# Altium PCB Rackmount_DSP.PcbDoc (part 5 of 24)
Units mil, origin at the board's own origin, x right, y up, seen from the top; angles counter-clockwise.
Board outline 10629.92 x 8267.72 mil, 4 copper layers (Top Layer, Mid Layer 1, Mid Layer 2, Bottom Layer), stack 36.2 mil thick; 4500 components, 1565 nets, 9765 pads, 3289 vias.
Unrouted connection lines stored in the file: 1.
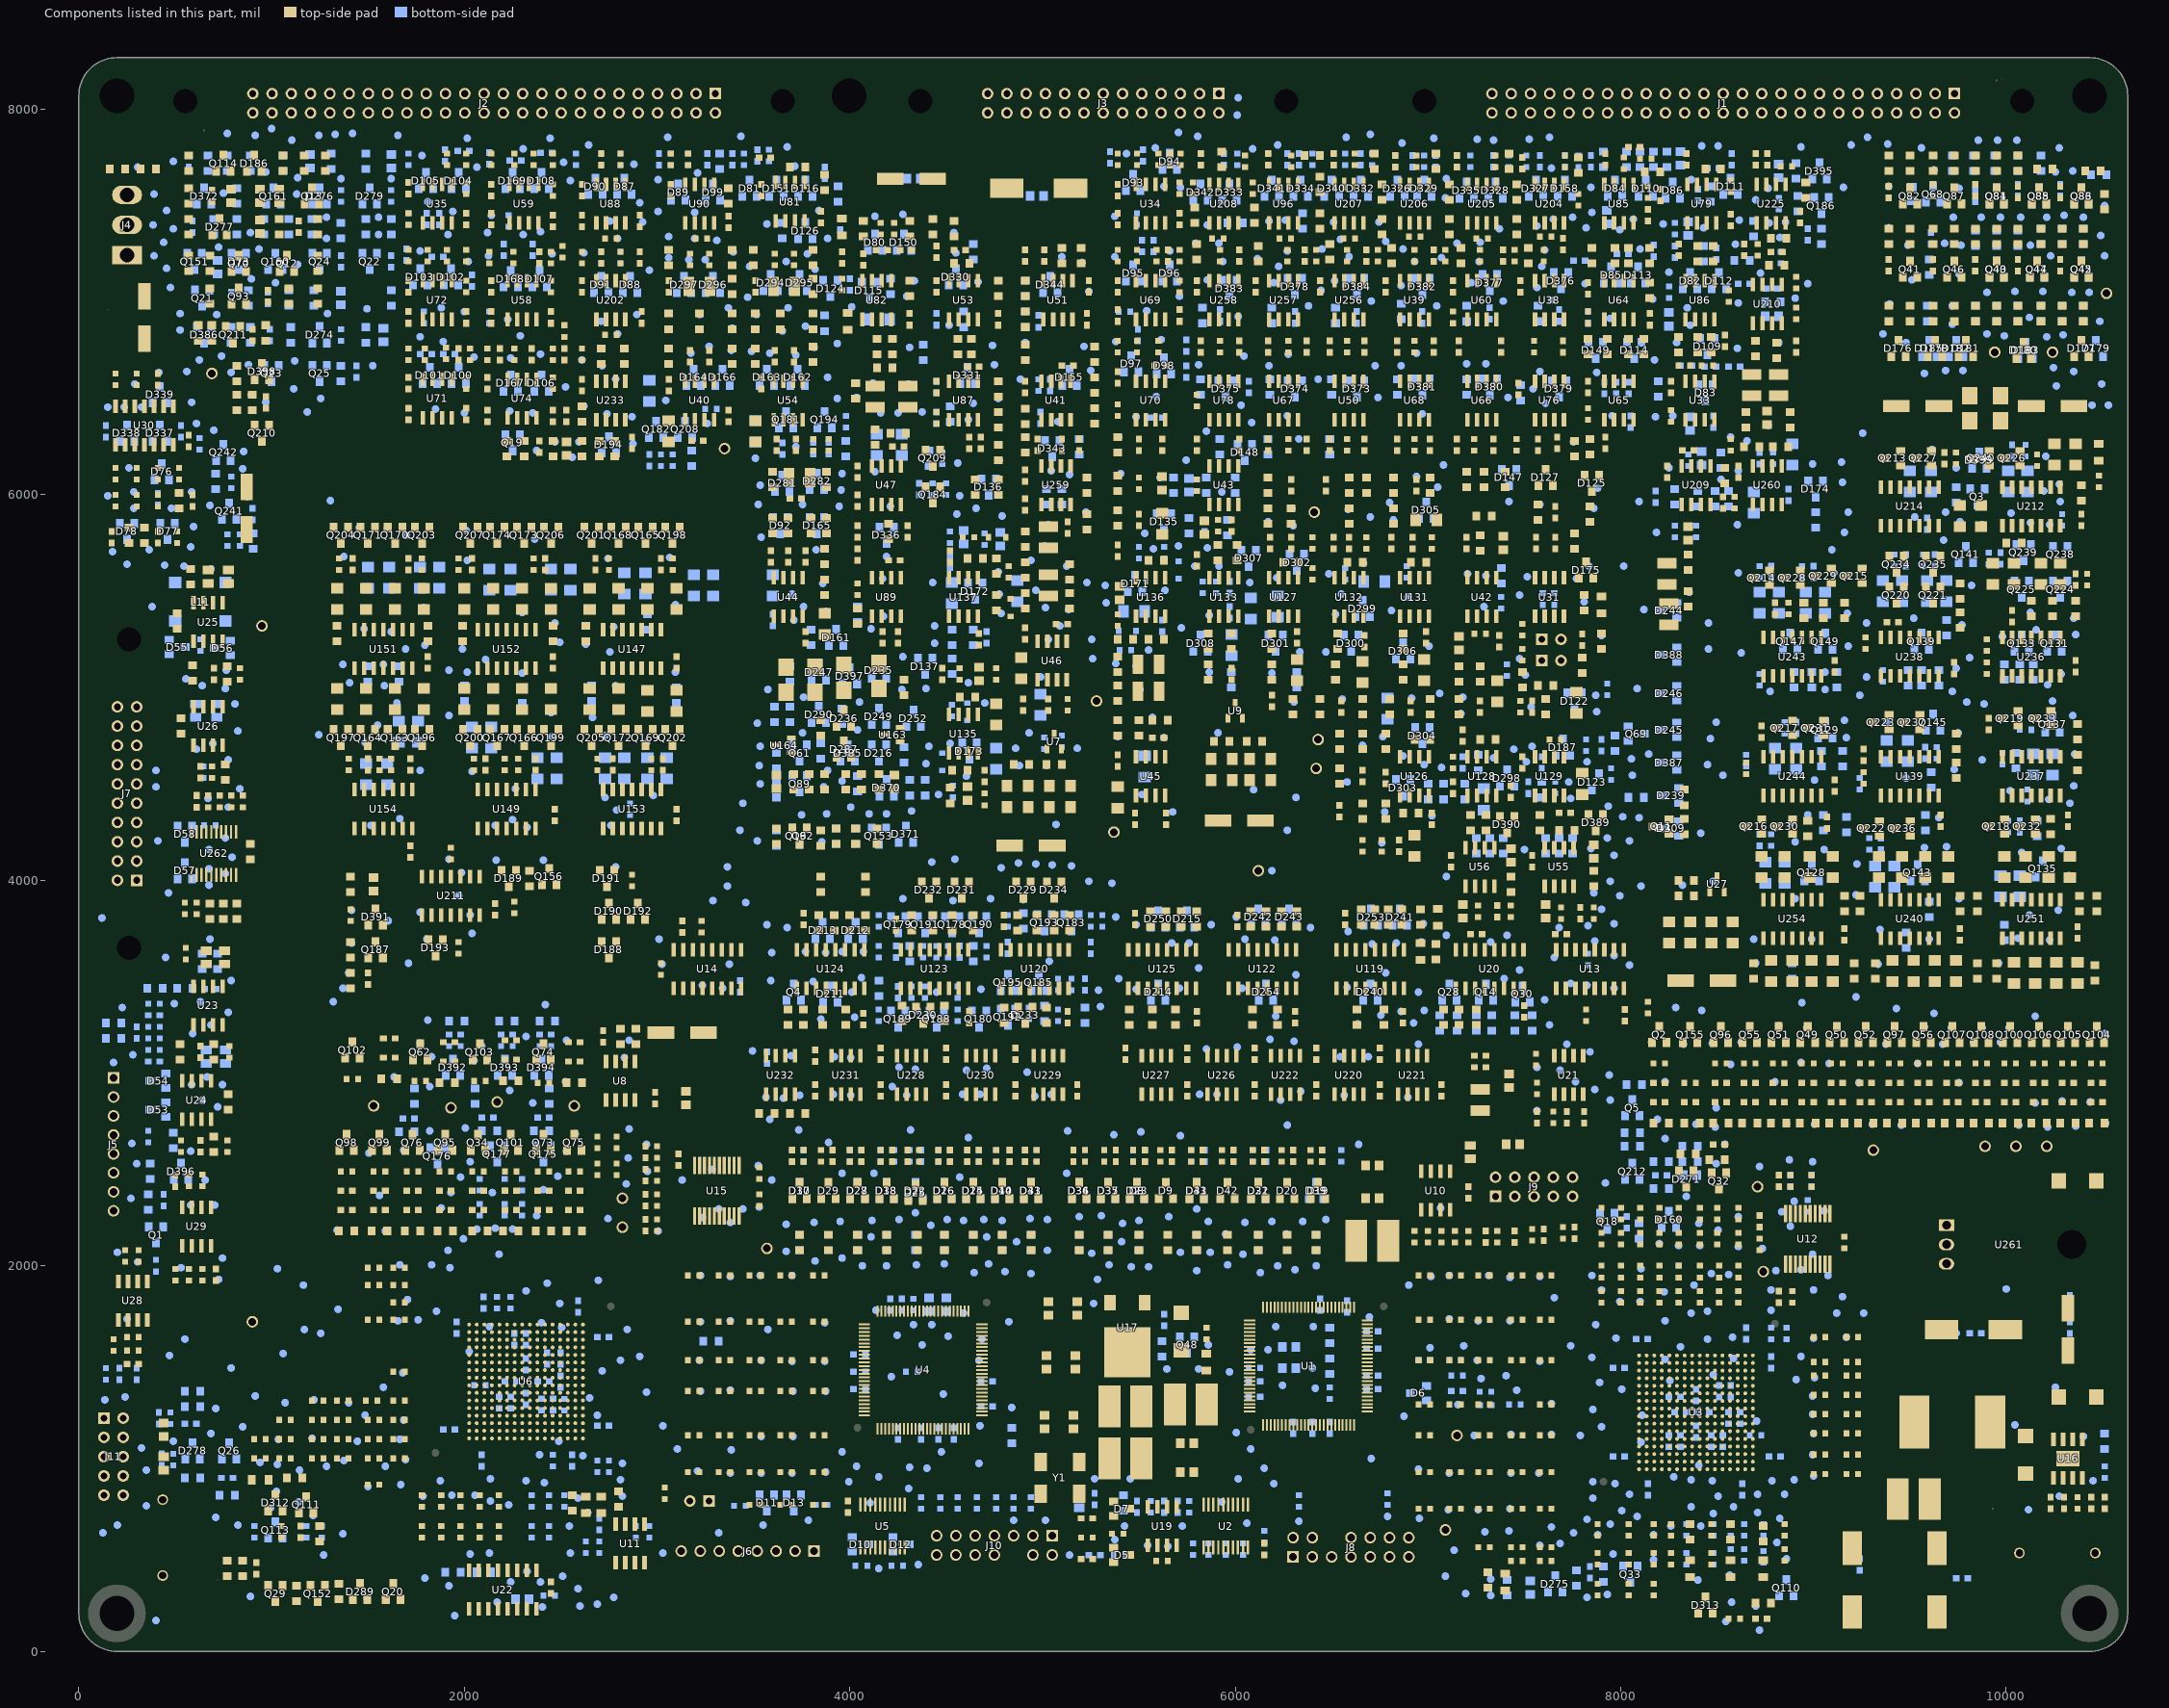
[diagram p7: the components of this part, seen from the top]

## Components (designator, comment, footprint, x,y, rotation, side; value= is the part's Value field where it differs from the comment) (continued)
TP1519 "Comment" ict-smd40 9755,3905 r0 bottom
TP1520 "Comment" ict-smd40 9480,4530 r0 bottom
TP1524 "Comment" ict-smd40 9695,4010 r0 bottom
TP1525 "Comment" ict-smd40 9690,4175 r0 bottom
TP1526 "Comment" ict-smd40 9740,5100 r0 bottom
TP1531 "Comment" ict-smd40 9650,4325 r0 bottom
TP1532 "Comment" ict-smd40 9335,3565 r0 bottom
TP1534 "Comment" ict-smd40 9750,4765 r0 bottom
TP1535 "Comment" ict-smd40 9730,4575 r0 bottom
TP1537 "Comment" ict-smd40 9220,3925 r0 bottom
TP1538 "Comment" ict-smd40 8775,4980 r0 bottom
TP1539 "Comment" ict-smd40 8700,3570 r0 bottom
TP1540 "Comment" ict-smd40 8905,3905 r0 bottom
TP1541 "Comment" ict-smd40 8990,3695 r0 bottom
TP1542 "Comment" ict-smd40 8690,3695 r0 bottom
TP1546 "Comment" ict-smd40 9060,4990 r0 bottom
TP1547 "Comment" ict-smd40 9175,5385 r0 bottom
TP1554 "Comment" ict-smd40 9170,4740 r0 bottom
TP1555 "Comment" ict-smd40 9160,4830 r0 bottom
TP1557 "Comment" ict-smd40 9005,4520 r0 bottom
TP1562 "Comment" ict-smd40 6690,3085 r0 bottom
TP1563 "Comment" ict-smd40 5370,2680 r0 bottom
TP1564 "Comment" ict-smd40 7935,4385 r0 bottom
TP1565 "Comment" ict-smd40 2410,4105 r0 bottom
TP1567 "Comment" ict-smd40 2110,5145 r0 bottom
TP1568 "Comment" ict-smd40 2755,5185 r0 bottom
TP1570 "Comment" ict-smd40 1990,5200 r0 bottom
TP1571 "Comment" ict-smd40 2325,4275 r0 bottom
TP1572 "Comment" ict-smd40 1795,5220 r0 bottom
TP1574 "Comment" ict-smd40 2145,4880 r0 bottom
TP1575 "Comment" ict-smd40 1620,5290 r0 bottom
TP1576 "Comment" ict-smd40 1550,4805 r0 bottom
TP1577 "Comment" ict-smd40 8230,2955 r0 bottom
TP1578 "Comment" ict-smd40 5290,3430 r0 bottom
TP1579 "Comment" ict-smd40 4730,3905 r0 bottom
TP1580 "Comment" ict-smd40 5240,3995 r0 bottom
TP1581 "Comment" ict-smd40 1920,4855 r0 bottom
TP1582 "Comment" ict-smd40 1710,3570 r0 bottom
TP1583 "Comment" ict-smd40 1405,5025 r0 bottom
TP1584 "Comment" ict-smd40 1370,5120 r0 bottom
TP1585 "Comment" ict-smd40 1585,5010 r0 bottom
TP1586 "Comment" ict-smd40 2665,4845 r0 bottom
TP1587 "Comment" ict-smd40 2630,5225 r0 bottom
TP1588 "Comment" ict-smd40 1920,5090 r0 bottom
TP1589 "Comment" ict-smd40 2030,3820 r0 bottom
TP1590 "Comment" ict-smd40 7865,2915 r0 bottom
TP1593 "Comment" ict-smd40 4605,4540 r0 bottom
TP1594 "Comment" ict-smd40 6550,5485 r0 bottom
TP1595 "Comment" ict-smd40 7340,4635 r0 bottom
TP1596 "Comment" ict-smd40 5790,5630 r0 bottom
TP1597 "Comment" ict-smd40 2470,5335 r0 bottom
TP1598 "Comment" ict-smd40 2010,5815 r0 bottom
TP1599 "Comment" ict-smd40 2450,4870 r0 bottom
TP1600 "Comment" ict-smd40 1600,5825 r0 bottom
TP1603 "Comment" ict-smd40 1455,5830 r0 bottom
TP1604 "Comment" ict-smd40 1245,4755 r0 bottom
TP1605 "Comment" ict-smd40 8045,4205 r0 bottom
TP1606 "Comment" ict-smd40 7510,4615 r0 bottom
TP1607 "Comment" ict-smd40 4965,4085 r0 bottom
TP1608 "Comment" ict-smd40 6640,2630 r0 bottom
TP1609 "Comment" ict-smd40 7965,3610 r0 bottom
TP1610 "Comment" ict-smd40 10115,735 r0 bottom
TP1611 "Comment" ict-smd40 10450,885 r0 bottom
TP1612 "Comment" ict-smd40 2000,6950 r0 bottom
TP1613 "Comment" ict-smd40 8065,7430 r0 bottom
TP1614 "Comment" ict-smd40 7920,2430 r0 bottom
TP1615 "Comment" ict-smd40 1370,3440 r0 bottom
TP1616 "Comment" ict-smd40 1320,3370 r0 bottom
TP1617 "Comment" ict-smd40 7630,7855 r0 bottom
TP1618 "Comment" ict-smd40 7070,7230 r0 bottom
TP1619 "Comment" ict-smd40 7070,4585 r0 bottom
TP1620 "Comment" ict-smd40 7020,4335 r0 bottom
TP1621 "Comment" ict-smd40 7445,4680 r0 bottom
TP1622 "Comment" ict-smd40 2015,5080 r0 bottom
TP1623 "Comment" ict-smd40 2775,5315 r0 bottom
TP1624 "Comment" ict-smd40 2160,4285 r0 bottom
TP1625 "Comment" ict-smd40 2165,4105 r0 bottom
TP1626 "Comment" ict-smd40 2250,4315 r0 bottom
TP1627 "Comment" ict-smd40 1985,4040 r0 bottom
TP1628 "Comment" ict-smd40 3445,4400 r0 bottom
TP1629 "Comment" ict-smd40 1790,5415 r0 bottom
TP1630 "Comment" ict-smd40 3095,5080 r0 bottom
TP1631 "Comment" ict-smd40 2760,4285 r0 bottom
TP1632 "Comment" ict-smd40 2040,3725 r0 bottom
TP1633 "Comment" ict-smd40 2785,4070 r0 bottom
TP1634 "Comment" ict-smd40 1970,3920 r0 bottom
TP1635 "Comment" ict-smd40 1580,5120 r0 bottom
TP1636 "Comment" ict-smd40 2000,5405 r0 bottom
TP1637 "Comment" ict-smd40 1515,4285 r0 bottom
TP1638 "Comment" ict-smd40 1770,3835 r0 bottom
TP1639 "Comment" ict-smd40 1605,3790 r0 bottom
TP1640 "Comment" ict-smd40 1805,3695 r0 bottom
TP1641 "Comment" ict-smd40 1920,4110 r0 bottom
TP1643 "Comment" ict-smd40 7740,4425 r0 bottom
TP1644 "Comment" ict-smd40 1695,5200 r0 bottom
TP1645 "Comment" ict-smd40 1480,5305 r0 bottom
TP1646 "Comment" ict-smd40 3010,3695 r0 bottom
TP1647 "Comment" ict-smd40 2300,5075 r0 bottom
TP1648 "Comment" ict-smd40 2300,5390 r0 bottom
TP1649 "Comment" ict-smd40 2785,5010 r0 bottom
TP1650 "Comment" ict-smd40 3095,5430 r0 bottom
TP1651 "Comment" ict-smd40 3960,3630 r0 bottom
TP1652 "Comment" ict-smd40 4070,3630 r0 bottom
TP1653 "Comment" ict-smd40 3770,3630 r0 bottom
TP1654 "Comment" ict-smd40 3875,3625 r0 bottom
TP1655 "Comment" ict-smd40 8495,2530 r0 bottom
TP1657 "Comment" ict-smd40 8170,605 r0 bottom
TP1658 "Comment" ict-smd40 8005,730 r0 bottom
TP1659 "Comment" ict-smd40 8085,700 r0 bottom
TP1660 "Comment" ict-smd40 7945,660 r0 bottom
TP1661 "Comment" ict-smd40 3495,3115 r0 bottom
TP1662 "Comment" ict-smd40 5050,4080 r0 bottom
TP1663 "Comment" ict-smd40 5150,4075 r0 bottom
TP1664 "Comment" ict-smd40 4785,4065 r0 bottom
TP1666 "Comment" ict-smd40 4450,3420 r0 bottom
TP1667 "Comment" ict-smd40 10195,6020 r0 bottom
TP1668 "Comment" ict-smd40 325,6455 r0 bottom
TP1669 "Comment" ict-smd40 2640,720 r0 bottom
TP1670 "Comment" ict-smd40 2820,805 r0 bottom
TP1671 "Comment" ict-smd40 710,1260 r0 bottom
TP1672 "Comment" ict-smd40 350,755 r0 bottom
TP1673 "Comment" ict-smd40 9960,6390 r0 bottom
TP1674 "Comment" ict-smd40 10255,1370 r0 bottom
TP1675 "Comment" ict-smd40 385,7400 r0 bottom
TP1676 "Comment" ict-smd40 390,7240 r0 bottom
TP1677 "Comment" ict-smd40 390,7560 r0 bottom
TP1678 "Comment" ict-smd40 9275,5335 r0 bottom
TP1679 "Comment" ict-smd40 6315,4430 r0 bottom
TP1680 "Comment" ict-smd40 7680,3755 r0 bottom
TP1681 "Comment" ict-smd40 7325,3680 r0 bottom
TP1682 "Comment" ict-smd40 8565,395 r0 bottom
TP1683 "Comment" ict-smd40 8415,650 r0 bottom
TP1684 "Comment" ict-smd40 655,2445 r0 bottom
TP1685 "Comment" ict-smd40 7505,5065 r0 bottom
TP1686 "Comment" ict-smd40 7690,5140 r0 bottom
TP1687 "Comment" ict-smd40 5300,3345 r0 bottom
TP1688 "Comment" ict-smd40 5035,3580 r0 bottom
TP1689 "Comment" ict-smd40 4900,3900 r0 bottom
TP1690 "Comment" ict-smd40 5380,3810 r0 bottom
TP1691 "Comment" ict-smd40 4560,6165 r0 bottom
TP1692 "Comment" ict-smd40 4570,5995 r0 bottom
TP1693 "Comment" ict-smd40 7845,4165 r0 bottom
TP1695 "Comment" ict-smd40 7965,3775 r0 bottom
TP1696 "Comment" ict-smd40 7930,4220 r0 bottom
TP1697 "Comment" ict-smd40 7860,3935 r0 bottom
TP1698 "Comment" ict-smd40 7410,3715 r0 bottom
TP1699 "Comment" ict-smd40 7500,4160 r0 bottom
TP1703 "Comment" ict-smd40 3065,5675 r0 bottom
TP1706 "Comment" ict-smd40 2745,5670 r0 bottom
TP1707 "Comment" ict-smd40 2265,4475 r0 bottom
TP1710 "Comment" ict-smd40 2945,4715 r0 bottom
TP1711 "Comment" ict-smd40 1700,5790 r0 bottom
TP1712 "Comment" ict-smd40 1375,5680 r0 bottom
TP1714 "Comment" ict-smd40 8855,7415 r0 bottom
TP1715 "Comment" ict-smd40 9155,7595 r0 bottom
TP1716 "Comment" ict-smd40 8765,7590 r0 bottom
TP1721 "Comment" ict-smd40 7515,5575 r0 bottom
TP1722 "Comment" ict-smd40 5610,6090 r0 bottom
TP1723 "Comment" ict-smd40 2365,5770 r0 bottom
TP1724 "Comment" ict-smd40 2015,5660 r0 bottom
TP1726 "Comment" ict-smd40 5125,5630 r0 bottom
TP1727 "Comment" ict-smd40 4060,3495 r0 bottom
TP1728 "Comment" ict-smd40 4350,3325 r0 bottom
TP1729 "Comment" ict-smd40 4275,3905 r0 bottom
TP1730 "Comment" ict-smd40 4245,1640 r0 bottom
TP1731 "Comment" ict-smd40 4135,1770 r0 bottom
TP1732 "Comment" ict-smd40 3595,2445 r0 bottom
TP1733 "Comment" ict-smd40 9740,1650 r0 bottom
TP1734 "Comment" ict-smd40 8245,3675 r0 bottom
TP1735 "Comment" ict-smd40 3675,3755 r0 bottom
TP1736 "Comment" ict-smd40 3710,5350 r0 bottom
TP1737 "Comment" ict-smd40 2525,6560 r0 bottom
TP1739 "Comment" ict-smd40 10275,6055 r0 bottom
TP1740 "Comment" ict-smd40 8275,905 r0 bottom
TP1741 "Comment" ict-smd40 8365,890 r0 bottom
TP1742 "Comment" ict-smd40 8405,965 r0 bottom
TP1743 "Comment" ict-smd40 8365,750 r0 bottom
TP1744 "Comment" ict-smd40 5715,2675 r0 bottom
TP1745 "Comment" ict-smd40 7095,4020 r0 bottom
TP1746 "Comment" ict-smd40 2375,2260 r0 bottom
TP1747 "Comment" ict-smd40 2065,2190 r0 bottom
TP1748 "Comment" ict-smd40 2160,2195 r0 bottom
TP1750 "Comment" ict-smd40 6090,7795 r0 bottom
TP1751 "Comment" ict-smd40 9760,5860 r0 bottom
TP1752 "Comment" ict-smd40 4785,5385 r0 bottom
TP1753 "Comment" ict-smd40 5325,5530 r0 bottom
TP1754 "Comment" ict-smd40 5265,1805 r0 bottom
TP1755 "Comment" ict-smd40 7765,2955 r0 bottom
TP1756 "Comment" ict-smd40 7685,3015 r0 bottom
TP1757 "Comment" ict-smd40 6695,1735 r0 bottom
TP1758 "Comment" ict-smd40 2980,4440 r0 bottom
TP1759 "Comment" ict-smd40 2730,4430 r0 bottom
TP1760 "Comment" ict-smd40 1650,4920 r0 bottom
TP1761 "Comment" ict-smd40 1605,7980 r0 bottom
TP1762 "Comment" ict-smd40 1800,8080 r0 bottom
TP1763 "Comment" ict-smd40 9130,8085 r0 bottom
TP1764 "Comment" ict-smd40 9035,8075 r0 bottom
TP1765 "Comment" ict-smd40 9125,7985 r0 bottom
TP1766 "Comment" ict-smd40 8930,8080 r0 bottom
TP1767 "Comment" ict-smd40 8930,7985 r0 bottom
TP1768 "Comment" ict-smd40 8730,7985 r0 bottom
TP1769 "Comment" ict-smd40 9255,6320 r0 bottom
TP1770 "Comment" ict-smd40 8970,4340 r0 bottom
TP1771 "Comment" ict-smd40 9055,4160 r0 bottom
TP1772 "Comment" ict-smd40 9060,5080 r0 bottom
TP1773 "Comment" ict-smd40 8885,4300 r0 bottom
TP1774 "Comment" ict-smd40 8625,5180 r0 bottom
TP1775 "Comment" ict-smd40 9770,5325 r0 bottom
TP1776 "Comment" ict-smd40 9820,5530 r0 bottom
TP1777 "Comment" ict-smd40 10285,4165 r0 bottom
TP1778 "Comment" ict-smd40 10330,4400 r0 bottom
TP1779 "Comment" ict-smd40 10270,3845 r0 bottom
TP1780 "Comment" ict-smd40 410,4205 r0 bottom
TP1781 "Comment" ict-smd40 775,4625 r0 bottom
TP1782 "Comment" ict-smd40 120,3805 r0 bottom
TP1783 "Comment" ict-smd40 1255,1650 r0 bottom
TP1784 "Comment" ict-smd40 1170,1670 r0 bottom
TP1785 "Comment" ict-smd40 1345,1775 r0 bottom
TP1786 "Comment" ict-smd40 720,2825 r0 bottom
TP1787 "Comment" ict-smd40 9685,5910 r0 bottom
TP1788 "Comment" ict-smd40 9740,6140 r0 bottom
TP1789 "Comment" ict-smd40 9855,7840 r0 bottom
TP1790 "Comment" ict-smd40 10125,5390 r0 bottom
TP1791 "Comment" ict-smd40 4875,4090 r0 bottom
TP1792 "Comment" ict-smd40 9955,7840 r0 bottom
TP1796 "Comment" ict-smd40 685,3250 r0 bottom
TP1797 "Comment" ict-smd40 760,4035 r0 bottom
TP1798 "Comment" ict-smd40 675,3975 r0 bottom
TP1799 "Comment" ict-smd40 465,3935 r0 bottom
TP1800 "Comment" ict-smd40 745,2940 r0 bottom
TP1801 "Comment" ict-smd40 665,2980 r0 bottom
TP1802 "Comment" ict-smd40 760,4220 r0 bottom
TP1803 "Comment" ict-smd40 675,4160 r0 bottom
TP1804 "Comment" ict-smd40 670,4425 r0 bottom
TP1805 "Comment" ict-smd40 795,4120 r0 bottom
TP1807 "Comment" ict-smd40 3875,5395 r0 bottom
TP1808 "Comment" ict-smd40 8340,2360 r0 bottom
TP1809 "Comment" ict-smd40 7945,2860 r0 bottom
TP1810 "Comment" ict-smd40 7940,2990 r0 bottom
TP1811 "Comment" ict-smd40 8230,2660 r0 bottom
TP1812 "Comment" ict-smd40 8190,2760 r0 bottom
TP1813 "Comment" ict-smd40 8770,7410 r0 bottom
TP1814 "Comment" ict-smd40 8700,7530 r0 bottom
TP1815 "Comment" ict-smd40 8615,7425 r0 bottom
TP1816 "Comment" ict-smd40 895,6520 r0 bottom
TP1817 "Comment" ict-smd40 970,6480 r0 bottom
TP1818 "Comment" ict-smd40 525,6940 r0 bottom
TP1819 "Comment" ict-smd40 790,6635 r0 bottom
TP1820 "Comment" ict-smd40 1115,6550 r0 bottom
TP1821 "Comment" ict-smd40 525,6855 r0 bottom
TP1822 "Comment" ict-smd40 8905,4200 r0 bottom
TP1823 "Comment" ict-smd40 9105,5595 r0 bottom
TP1824 "Comment" ict-smd40 8610,5595 r0 bottom
TP1825 "Comment" ict-smd40 9225,4085 r0 bottom
TP1826 "Comment" ict-smd40 9380,4820 r0 bottom
TP1827 "Comment" ict-smd40 9675,5765 r0 bottom
TP1828 "Comment" ict-smd40 9520,5360 r0 bottom
TP1829 "Comment" ict-smd40 10080,4145 r0 bottom
TP1830 "Comment" ict-smd40 2875,6265 r0 bottom
TP1831 "Comment" ict-smd40 3935,6500 r0 bottom
TP1832 "Comment" ict-smd40 3260,6370 r0 bottom
TP1833 "Comment" ict-smd40 3720,6250 r0 bottom
TP1834 "Comment" ict-smd40 4680,3435 r0 bottom
TP1835 "Comment" ict-smd40 1415,3845 r0 bottom
TP1836 "Comment" ict-smd40 1415,3675 r0 bottom
TP1837 "Comment" ict-smd40 1400,3520 r0 bottom
TP1838 "Comment" ict-smd40 9875,5845 r0 bottom
TP1839 "Comment" ict-smd40 10025,5905 r0 bottom
TP1840 "Comment" ict-smd40 10205,6200 r0 bottom
TP1841 "Comment" ict-smd40 9615,6235 r0 bottom
TP1842 "Comment" ict-smd40 4535,3895 r0 bottom
TP1843 "Comment" ict-smd40 1665,4320 r0 bottom
TP1844 "Comment" ict-smd40 2320,3190 r0 bottom
TP1845 "Comment" ict-smd40 2235,2910 r0 bottom
TP1846 "Comment" ict-smd40 2005,2715 r0 bottom
TP1847 "Comment" ict-smd40 1485,4715 r0 bottom
TP1848 "Comment" ict-smd40 1770,4570 r0 bottom
TP1849 "Comment" ict-smd40 2790,4365 r0 bottom
TP1850 "Comment" ict-smd40 2730,4750 r0 bottom
TP1851 "Comment" ict-smd40 1810,3275 r0 bottom
TP1852 "Comment" ict-smd40 1820,2930 r0 bottom
TP1853 "Comment" ict-smd40 1820,2700 r0 bottom
TP1854 "Comment" ict-smd40 2040,4565 r0 bottom
TP1855 "Comment" ict-smd40 2455,4745 r0 bottom
TP1856 "Comment" ict-smd40 2420,3355 r0 bottom
TP1857 "Comment" ict-smd40 2525,2955 r0 bottom
TP1858 "Comment" ict-smd40 2355,2845 r0 bottom
TP1859 "Comment" ict-smd40 695,4710 r0 bottom
TP1861 "Comment" ict-smd40 765,5090 r0 bottom
TP1862 "Comment" ict-smd40 445,5635 r0 bottom
TP1863 "Comment" ict-smd40 7830,3765 r0 bottom
TP1864 "Comment" ict-smd40 400,4570 r0 bottom
TP1866 "Comment" ict-smd40 580,2595 r0 bottom
TP1867 "Comment" ict-smd40 400,160 r0 bottom
TP1868 "Comment" ict-smd40 8935,7805 r0 bottom
TP1869 "Comment" ict-smd40 8505,2185 r0 bottom
TP1870 "Comment" ict-smd40 1305,5970 r0 bottom
TP1871 "Comment" ict-smd40 2145,2380 r0 bottom
TP1872 "Comment" ict-smd40 1980,2460 r0 bottom
TP1873 "Comment" ict-smd40 2485,2465 r0 bottom
TP1874 "Comment" ict-smd40 835,4475 r0 bottom
TP1875 "Comment" ict-smd40 450,3600 r0 bottom
TP1876 "Comment" ict-smd40 10125,5855 r0 bottom
TP1877 "Comment" ict-smd40 825,4775 r0 bottom
TP1878 "Comment" ict-smd40 585,2940 r0 bottom
TP1879 "Comment" ict-smd40 495,3360 r0 bottom
TP1880 "Comment" ict-smd40 775,4380 r0 bottom
TP1881 "Comment" ict-smd40 555,5045 r0 bottom
TP1882 "Comment" ict-smd40 7475,5150 r0 bottom
TP1883 "Comment" ict-smd40 7590,5250 r0 bottom
TP1884 "Comment" ict-smd40 3550,655 r0 bottom
TP1885 "Comment" ict-smd40 855,6225 r0 bottom
TP1886 "Comment" ict-smd40 610,4680 r0 bottom
TP1887 "Comment" ict-smd40 7325,290 r0 bottom
TP1888 "Comment" ict-smd40 2600,235 r0 bottom
TP1889 "Comment" ict-smd40 2590,325 r0 bottom
TP1890 "Comment" ict-smd40 2690,245 r0 bottom
TP1891 "Comment" ict-smd40 2775,280 r0 bottom
TP1892 "Comment" ict-smd40 2820,975 r0 bottom
TP1893 "Comment" ict-smd40 2615,1015 r0 bottom
TP1894 "Comment" ict-smd40 2490,1090 r0 bottom
TP1895 "Comment" ict-smd40 3195,7465 r0 bottom
TP1896 "Comment" ict-smd40 4150,430 r0 bottom
TP1897 "Comment" ict-smd40 4355,450 r0 bottom
TP1898 "Comment" ict-smd40 3785,680 r0 bottom
TP1899 "Comment" ict-smd40 675,4060 r0 bottom
TP1900 "Comment" ict-smd40 775,3315 r0 bottom
TP1901 "Comment" ict-smd40 590,3205 r0 bottom
TP1902 "Comment" ict-smd40 680,3695 r0 bottom
TP1903 "Comment" ict-smd40 790,3480 r0 bottom
TP1904 "Comment" ict-smd40 8560,1955 r0 bottom
TP1905 "Comment" ict-smd40 580,5730 r0 bottom
TP1906 "Comment" ict-smd40 545,5630 r0 bottom
TP1907 "Comment" ict-smd40 685,5615 r0 bottom
TP1908 "Comment" ict-smd40 640,5010 r0 bottom
TP1909 "Comment" ict-smd40 760,4995 r0 bottom
TP1910 "Comment" ict-smd40 850,6135 r0 bottom
TP1911 "Comment" ict-smd40 875,5990 r0 bottom
TP1912 "Comment" ict-smd40 680,5945 r0 bottom
TP1913 "Comment" ict-smd40 5705,5735 r0 bottom
TP1914 "Comment" ict-smd40 5380,5125 r0 bottom
TP1915 "Comment" ict-smd40 4700,4920 r0 bottom
TP1916 "Comment" ict-smd40 4790,5890 r0 bottom
TP1917 "Comment" ict-smd40 4410,4695 r0 bottom
TP1918 "Comment" ict-smd40 4775,5485 r0 bottom
TP1919 "Comment" ict-smd40 6450,7275 r0 bottom
TP1920 "Comment" ict-smd40 6220,7815 r0 bottom
TP1921 "Comment" ict-smd40 10230,7240 r0 bottom
TP1922 "Comment" ict-smd40 10120,6920 r0 bottom
TP1923 "Comment" ict-smd40 10125,7295 r0 bottom
TP1924 "Comment" ict-smd40 1135,7645 r0 bottom
TP1925 "Comment" ict-smd40 4425,4095 r0 bottom
TP1926 "Comment" ict-smd40 640,2860 r0 bottom
TP1927 "Comment" ict-smd40 630,3370 r0 bottom
TP1928 "Comment" ict-smd40 380,5420 r0 bottom
TP1929 "Comment" ict-smd40 810,4915 r0 bottom
U1 "37020038" qfp100-050-1414l 6380,1480 r180 top
U2 "36020209" sop20-26-173 5950,650 r180 top
U3 "42010083" BGA256-39-1616 8390,1240 r270 top
U4 "37020038" qfp100-050-1414l 4380,1460 r90 top
U5 "36020209" sop20-26-173 4170,650 r0 top
U6 "42010083" BGA256-39-1616 2320,1400 r270 top
U7 "39110445" SOT23-3 5060,4719.29 r0 top
U8 "39110294" sop8-50-150 2810,2960 r180 top
U9 "39110445" SOT23-3 6000,4879.29 r0 top
U10 "40030066" sop8-50-150 7040,2390 r180 top
U11 "40030066" sop8-50-150 2860,560 r0 top
U12 "38040019" sop20-26-208 8970,2140 r0 top
U13 "38020023" sop16-50-150 7840,3540 r180 top
U14 "38020023" sop16-50-150 3260,3540 r180 top
U15 "38040019" sop20-26-208 3310,2390 r0 top
U16 "39110298" SOP8-50-150-SR 10320,1000 r0 top
U17 "39110288" SOT-DPAK 5440,1810 r180 top
U19 "39110322" sop8-50-150 5620,650 r180 top
U20 "38020023" sop16-50-150 7320,3540 r180 top
U21 "39080011" sop8-50-150 7730,2990 r180 top
U22 "36020169" sop16-50-150 2200,320 r180 top
U23 "38090094" sop8-50-150 670,3350 r0 top
U24 "38090094" sop8-50-150 611.63,2860 r0 top
U25 "38090094" sop8-50-150 670,5340 r0 top
U26 "38090094" sop8-50-150 670,4800 r0 top
U27 "39110445" SOT23-3 8500,3979.29 r0 top
U28 "38090089" sop8-50-150 280,1820 r0 top
U29 "38090089" sop8-50-150 611.63,2204.11 r0 top
U30 "36020090" sop14-50-150 340,6360 r180 top
U31 "39080043" sop8-50-150 7630,5470 r180 top
U33 "39080043" sop8-50-150 8410,6490 r180 top
U34 "39080043" sop8-50-150 5560,7510 r180 top
U35 "39080043" sop8-50-150 1860,7510 r180 top
U38 "39080043" sop8-50-150 7630,7010 r180 top
U39 "39080043" sop8-50-150 6930,7010 r180 top
U40 "39080043" sop8-50-150 3220,6490 r180 top
U41 "39080043" sop8-50-150 5070,6490 r180 top
U42 "39080043" sop8-50-150 7280,5470 r180 top
U43 "39080043" sop8-50-150 5940,6050 r180 top
U44 "39080043" sop8-50-150 3680,5470 r180 top
U45 "39080043" sop8-50-150 5560,4540 r180 top
U46 "39080043" sop8-50-150 5050,5140 r180 top
U47 "39080043" sop8-50-150 4190,6050 r180 top
U50 "39080043" sop8-50-150 6590,6490 r180 top
U51 "39080043" sop8-50-150 5080,7010 r180 top
U53 "39080043" sop8-50-150 4590,7010 r180 top
U54 "39080043" sop8-50-150 3680,6490 r180 top
U55 "39080043" sop8-50-150 7680,4070 r180 top
U56 "39080043" sop8-50-150 7270,4070 r180 top
U58 "39080043" sop8-50-150 2300,7010 r180 top
U59 "39080043" sop8-50-150 2310,7510 r180 top
U60 "39080043" sop8-50-150 7280,7010 r180 top
U64 "39080043" sop8-50-150 7990,7010 r180 top
U65 "39080043" sop8-50-150 7990,6490 r180 top
U66 "39080043" sop8-50-150 7280,6490 r180 top
U67 "39080043" sop8-50-150 6250,6490 r180 top
U68 "39080043" sop8-50-150 6930,6490 r180 top
U69 "39080043" sop8-50-150 5560,7010 r180 top
U70 "39080043" sop8-50-150 5560,6490 r180 top
U71 "39080043" sop8-50-150 1860,6500 r180 top
U72 "39080043" sop8-50-150 1860,7010 r180 top
U74 "39080043" sop8-50-150 2300,6500 r180 top
U76 "39080043" sop8-50-150 7630,6490 r180 top
U78 "39080043" sop8-50-150 5940,6490 r180 top
U79 "39080043" sop8-50-150 8420,7510 r180 top
U81 "39080043" sop8-50-150 3690,7520 r180 top
U82 "39080043" sop8-50-150 4140,7010 r180 top
U85 "39080043" sop8-50-150 7990,7510 r180 top
U86 "39080043" sop8-50-150 8410,7010 r180 top
U87 "39080043" sop8-50-150 4590,6490 r180 top
U88 "39080043" sop8-50-150 2760,7510 r180 top
U89 "39080043" sop8-50-150 4190,5470 r180 top
U90 "39080043" sop8-50-150 3220,7510 r180 top
U96 "39080043" sop8-50-150 6250,7510 r180 top
U119 "38020005" sop16-50-150 6700,3540 r180 top
U120 "38020005" sop16-50-150 4960,3540 r180 top
U122 "38020005" sop16-50-150 6140,3540 r180 top
U123 "38020005" sop16-50-150 4440,3540 r180 top
U124 "38020005" sop16-50-150 3900,3540 r180 top
U125 "38020005" sop16-50-150 5620,3540 r180 top
U126 "39030020" sop8-50-150 6930,4540 r180 top
U127 "39030020" sop8-50-150 6250,5470 r180 top
U128 "39030020" sop8-50-150 7280,4540 r180 top
U129 "39030020" sop8-50-150 7630,4540 r180 top
U131 "39030020" sop8-50-150 6930,5470 r180 top
U132 "39030020" sop8-50-150 6590,5470 r180 top
U133 "39030020" sop8-50-150 5940,5470 r180 top
U135 "39030020" sop8-50-150 4590,4760 r180 top
U136 "39030020" sop8-50-150 5560,5470 r180 top
U137 "39030020" sop8-50-150 4590,5470 r180 top
U139 "36020260" sop14-50-150 9500,4540 r180 top
U147 "36020299" sop14-50-150 2870,5200 r180 top
U149 "36020299" sop14-50-150 2220,4370 r180 top
U151 "36020299" sop14-50-150 1580,5200 r180 top
U152 "36020299" sop14-50-150 2220,5200 r180 top
U153 "36020299" sop14-50-150 2870,4370 r180 top
U154 "36020299" sop14-50-150 1580,4370 r180 top
U163 "39110445" SOT23-3 4221.88,4755 r90 top
U164 "39110445" SOT23-3 3656.88,4700 r90 top
U202 "39080043" sop8-50-150 2760,7010 r180 top
U204 "39080043" sop8-50-150 7630,7510 r180 top
U205 "39080043" sop8-50-150 7280,7510 r180 top
U206 "39080043" sop8-50-150 6930,7510 r180 top
U207 "39080043" sop8-50-150 6590,7510 r180 top
U208 "39080043" sop8-50-150 5940,7510 r180 top
U209 "39080043" sop8-50-150 8390,6050 r180 top
U210 "39080043" sop8-50-150 8760,6990 r180 top
U211 "36020299" sop14-50-150 1930,3920 r180 top
U212 "36020299" sop14-50-150 10130,5940 r180 top
U214 "36020260" sop14-50-150 9500,5940 r180 top
U220 "39080043" sop8-50-150 6590,2990 r180 top
U221 "39080043" sop8-50-150 6920,2990 r180 top
U222 "39080043" sop8-50-150 6260,2990 r180 top
U225 "39080043" sop8-50-150 8780,7510 r180 top
U226 "39080043" sop8-50-150 5930,2990 r180 top
U227 "39080043" sop8-50-150 5590,2990 r180 top
U228 "39080043" sop8-50-150 4320,2990 r180 top
U229 "39080043" sop8-50-150 5030,2990 r180 top
U230 "39080043" sop8-50-150 4680,2990 r180 top
U231 "39080043" sop8-50-150 3980,2990 r180 top
U232 "39080043" sop8-50-150 3640,2990 r180 top
U233 "39080043" sop8-50-150 2760,6490 r180 top
U236 "36020260" sop14-50-150 10130,5160 r180 top
U237 "36020260" sop14-50-150 10130,4540 r180 top
U238 "36020260" sop14-50-150 9500,5160 r180 top
U240 "36020299" sop14-50-150 9500,3800 r180 top
U243 "36020260" sop14-50-150 8890,5160 r180 top
U244 "36020260" sop14-50-150 8890,4540 r180 top
U251 "36020299" sop14-50-150 10130,3800 r180 top
U254 "36020299" sop14-50-150 8890,3800 r180 top
U256 "39080043" sop8-50-150 6590,7010 r180 top
U257 "39080043" sop8-50-150 6250,7010 r180 top
U258 "39080043" sop8-50-150 5940,7010 r180 top
U259 "39080043" sop8-50-150 5070,6050 r180 top
U260 "39030020" sop8-50-150 8760,6050 r180 top
U261 "39110258" to220-3ra 9690,2110 r270 top
U262 "36020320" sop20-26-173 700,4140 r0 top
Y1 "12010179" SX4-0705 5090,900 r270 top

## Footprints (in the part's own frame and the unit in brackets; to place one, negate y for a bottom-side part, rotate by r counter-clockwise, add the part's x,y. Pads: shape width x height; smd on the part's side, far side on the other; paste and mask are expansions set on the pad)
BGA256-39-1616 [mil]
  round 20 smd paste+0 mask+2.5: A1(-295.28,295.28) A2(-255.91,295.28) A3(-216.54,295.28) A4(-177.17,295.28) A5(-137.8,295.28) A6(-98.43,295.28) A7(-59.06,295.28) A8(-19.68,295.28) A9(19.68,295.28) A10(59.06,295.28) A11(98.43,295.28) A12(137.8,295.28) A13(177.17,295.28) A14(216.54,295.28) A15(255.91,295.28) A16(295.28,295.28) B1(-295.28,255.91) B2(-255.91,255.91) B3(-216.54,255.91) B4(-177.17,255.91) B5(-137.8,255.91) B6(-98.43,255.91) B7(-59.06,255.91) B8(-19.68,255.91) B9(19.68,255.91) B10(59.06,255.91) B11(98.43,255.91) B12(137.8,255.91) B13(177.17,255.91) B14(216.54,255.91) B15(255.91,255.91) B16(295.28,255.91) C1(-295.28,216.54) C2(-255.91,216.54) C3(-216.54,216.54) C4(-177.17,216.54) C5(-137.8,216.54) C6(-98.43,216.54) C7(-59.06,216.54) C8(-19.68,216.54) C9(19.68,216.54) C10(59.06,216.54) C11(98.43,216.54) C12(137.8,216.54) C13(177.17,216.54) C14(216.54,216.54) C15(255.91,216.54) C16(295.28,216.54) D1(-295.28,177.17) D2(-255.91,177.17) D3(-216.54,177.17) D4(-177.17,177.17) D5(-137.8,177.17) D6(-98.43,177.17) D7(-59.06,177.17) D8(-19.68,177.17) D9(19.68,177.17) D10(59.06,177.17) D11(98.43,177.17) D12(137.8,177.17) D13(177.17,177.17) D14(216.54,177.17) D15(255.91,177.17) D16(295.28,177.17) E1(-295.28,137.8) E2(-255.91,137.8) E3(-216.54,137.8) E4(-177.17,137.8) E5(-137.8,137.8) E6(-98.43,137.8) E7(-59.06,137.8) E8(-19.68,137.8) E9(19.68,137.8) E10(59.06,137.8) E11(98.43,137.8) E12(137.8,137.8) E13(177.17,137.8) E14(216.54,137.8) E15(255.91,137.8) E16(295.28,137.8) F1(-295.28,98.43) F2(-255.91,98.43) F3(-216.54,98.43) F4(-177.17,98.43) F5(-137.8,98.43) F6(-98.43,98.43) F7(-59.06,98.43) F8(-19.68,98.43) F9(19.68,98.43) F10(59.06,98.43) F11(98.43,98.43) F12(137.8,98.43) F13(177.17,98.43) F14(216.54,98.43) F15(255.91,98.43) F16(295.28,98.43) G1(-295.28,59.06) G2(-255.91,59.06) G3(-216.54,59.06) G4(-177.17,59.06) G5(-137.8,59.06) G6(-98.43,59.06) G7(-59.06,59.06) G8(-19.68,59.06) G9(19.68,59.06) G10(59.06,59.06) G11(98.43,59.06) G12(137.8,59.06) G13(177.17,59.06) G14(216.54,59.06) G15(255.91,59.06) G16(295.28,59.06) H1(-295.28,19.68) H2(-255.91,19.68) H3(-216.54,19.68) H4(-177.17,19.68) H5(-137.8,19.68) H6(-98.43,19.68) H7(-59.06,19.68) H8(-19.68,19.68) H9(19.68,19.68) H10(59.06,19.68) H11(98.43,19.68) H12(137.8,19.68) H13(177.17,19.68) H14(216.54,19.68) H15(255.91,19.68) H16(295.28,19.68) J1(-295.28,-19.68) J2(-255.91,-19.68) J3(-216.54,-19.68) J4(-177.17,-19.68) J5(-137.8,-19.68) J6(-98.43,-19.68) J7(-59.06,-19.68) J8(-19.68,-19.68) J9(19.68,-19.68) J10(59.06,-19.68) J11(98.43,-19.68) J12(137.8,-19.68) J13(177.17,-19.68) J14(216.54,-19.68) J15(255.91,-19.68) J16(295.28,-19.68) K1(-295.28,-59.06) K2(-255.91,-59.06) K3(-216.54,-59.06) K4(-177.17,-59.06) K5(-137.8,-59.06) K6(-98.43,-59.06) K7(-59.06,-59.06) K8(-19.68,-59.06) K9(19.68,-59.06) K10(59.06,-59.06) K11(98.43,-59.06) K12(137.8,-59.06) K13(177.17,-59.06) K14(216.54,-59.06) K15(255.91,-59.06) K16(295.28,-59.06) L1(-295.28,-98.43) L2(-255.91,-98.43) L3(-216.54,-98.43) L4(-177.17,-98.43) L5(-137.8,-98.43) L6(-98.43,-98.43) L7(-59.06,-98.43) L8(-19.68,-98.43) L9(19.68,-98.43) L10(59.06,-98.43) L11(98.43,-98.43) L12(137.8,-98.43) L13(177.17,-98.43) L14(216.54,-98.43) L15(255.91,-98.43) L16(295.28,-98.43) M1(-295.28,-137.8) M2(-255.91,-137.8) M3(-216.54,-137.8) M4(-177.17,-137.8) M5(-137.8,-137.8) M6(-98.43,-137.8) M7(-59.06,-137.8) M8(-19.68,-137.8) M9(19.68,-137.8) M10(59.06,-137.8) M11(98.43,-137.8) M12(137.8,-137.8) M13(177.17,-137.8) M14(216.54,-137.8) M15(255.91,-137.8) M16(295.28,-137.8) N1(-295.28,-177.17) N2(-255.91,-177.17) N3(-216.54,-177.17) N4(-177.17,-177.17) N5(-137.8,-177.17) N6(-98.43,-177.17) N7(-59.06,-177.17) N8(-19.68,-177.17) N9(19.68,-177.17) N10(59.06,-177.17) N11(98.43,-177.17) N12(137.8,-177.17) N13(177.17,-177.17) N14(216.54,-177.17) N15(255.91,-177.17) N16(295.28,-177.17) P1(-295.28,-216.54) P2(-255.91,-216.54) P3(-216.54,-216.54) P4(-177.17,-216.54) P5(-137.8,-216.54) P6(-98.43,-216.54) P7(-59.06,-216.54) P8(-19.68,-216.54) P9(19.68,-216.54) P10(59.06,-216.54) P11(98.43,-216.54) P12(137.8,-216.54) P13(177.17,-216.54) P14(216.54,-216.54) P15(255.91,-216.54) P16(295.28,-216.54) R1(-295.28,-255.91) R2(-255.91,-255.91) R3(-216.54,-255.91) R4(-177.17,-255.91) R5(-137.8,-255.91) R6(-98.43,-255.91) R7(-59.06,-255.91) R8(-19.68,-255.91) R9(19.68,-255.91) R10(59.06,-255.91) R11(98.43,-255.91) R12(137.8,-255.91) R13(177.17,-255.91) R14(216.54,-255.91) R15(255.91,-255.91) R16(295.28,-255.91) T1(-295.28,-295.28) T2(-255.91,-295.28) T3(-216.54,-295.28) T4(-177.17,-295.28) T5(-137.8,-295.28) T6(-98.43,-295.28) T7(-59.06,-295.28) T8(-19.68,-295.28) T9(19.68,-295.28) T10(59.06,-295.28) T11(98.43,-295.28) T12(137.8,-295.28) T13(177.17,-295.28) T14(216.54,-295.28) T15(255.91,-295.28) T16(295.28,-295.28)
  silkscreen extent -364,-335 335,352, body extent -531,-531 531,531, height 93
CAP2-400-240-520-480 [mil]
  round 55 hole 38 paste-5000 mask+2.5: 1(0,0) 2(393.7,0)
  silkscreen extent -59,-118 453,118, body extent -59,-118 453,118, height 472
head0102-t [mil]
  rect 60x60 / inner round 60 / far side rect 60x60 hole 36 paste-5000 mask+2.5: 1(0,0)
  round 60 hole 36 paste-5000 mask+2.5: 2(100,0)
  silkscreen extent -50,-50 150,50, body extent -50,-50 150,50, height 330
head0205-t [mil]
  rect 60x60 / inner round 60 / far side rect 60x60 hole 36 paste-5000 mask+2.5: 1(-200,-50)
  round 60 hole 36 paste-5000 mask+2.5: 2(-200,50) 3(-100,-50) 4(-100,50) 5(0,-50) 6(0,50) 7(100,-50) 8(100,50) 9(200,-50) 10(200,50)
  silkscreen extent -250,-100 250,100, body extent -250,-100 250,100, height 330
head0207-t [mil]
  rect 60x60 / inner round 60 / far side rect 60x60 hole 40 paste-5000 mask+2.5: 1(-300,-50)
  round 60 hole 40 paste-5000 mask+2.5: 2(-300,50) 3(-200,-50) 4(-200,50) 5(-100,-50) 7(0,-50) 8(0,50) 9(100,-50) 10(100,50) 11(200,-50) 12(200,50) 13(300,-50) 14(300,50)
  round 1 hole 1 unplated paste-5000 mask-5000: 6(-100,50)
  silkscreen extent -350,-100 350,100, body extent -350,-100 350,100, height 330
ict-smd40 [mil]
  round 40 smd paste-5000 mask+4: 1(0,0)
idc20-otm1 [mil]
  rect 60x60 / inner round 60 / far side rect 60x60 hole 36 paste-5000 mask+2.5: 1(-450,-50)
  round 60 hole 36 paste-5000 mask+2.5: 2(-450,50) 3(-350,-50) 4(-350,50) 5(-250,-50) 6(-250,50) 7(-150,-50) 8(-150,50) 9(-50,-50) 10(-50,50) 11(50,-50) 12(50,50) 13(150,-50) 14(150,50) 15(250,-50) 16(250,50) 17(350,-50) 18(350,50) 19(450,-50) 20(450,50)
  round 100 hole 125 unplated paste-5000 mask+15: ""(-800,-10) ""(800,-10)
  silkscreen extent -1150,-180 1150,180, body extent -1150,-180 1150,180, height 1050
idc26-otm1 [mil]
  rect 60x60 / inner round 60 / far side rect 60x60 hole 36 paste-5000 mask+2.5: 1(-600,-50)
  round 60 hole 36 paste-5000 mask+2.5: 2(-600,50) 3(-500,-50) 4(-500,50) 5(-400,-50) 6(-400,50) 7(-300,-50) 8(-300,50) 9(-200,-50) 10(-200,50) 11(-100,-50) 12(-100,50) 13(0,-50) 14(0,50) 15(100,-50) 16(100,50) 17(200,-50) 18(200,50) 19(300,-50) 20(300,50) 21(400,-50) 22(400,50) 23(500,-50) 24(500,50) 25(600,-50) 26(600,50)
  round 100 hole 125 unplated paste-5000 mask+15: ""(-950,-10) ""(950,-10)
  silkscreen extent -1300,-180 1300,180, body extent -1300,-180 1300,180, height 1050
idc50-otm1 [mil]
  rect 60x60 / inner round 60 / far side rect 60x60 hole 36 paste-5000 mask+2.5: 1(-1200,-50)
  round 60 hole 36 paste-5000 mask+2.5: 2(-1200,50) 3(-1100,-50) 4(-1100,50) 5(-1000,-50) 6(-1000,50) 7(-900,-50) 8(-900,50) 9(-800,-50) 10(-800,50) 11(-700,-50) 12(-700,50) 13(-600,-50) 14(-600,50) 15(-500,-50) 16(-500,50) 17(-400,-50) 18(-400,50) 19(-300,-50) 20(-300,50) 21(-200,-50) 22(-200,50) 23(-100,-50) 24(-100,50) 25(0,-50) 26(0,50) 27(100,-50) 28(100,50) 29(200,-50) 30(200,50) 31(300,-50) 32(300,50) 33(400,-50) 34(400,50) 35(500,-50) 36(500,50) 37(600,-50) 38(600,50) 39(700,-50) 40(700,50) 41(800,-50) 42(800,50) 43(900,-50) 44(900,50) 45(1000,-50) 46(1000,50) 47(1100,-50) 48(1100,50) 49(1200,-50) 50(1200,50)
  round 100 hole 125 unplated paste-5000 mask+15: ""(-1550,-10) ""(1550,-10)
  silkscreen extent -1900,-180 1900,180, body extent -1900,-180 1900,180, height 1050
P101-3T-NEW [mil]
  rect 95x155 / inner round 95 / far side rect 95x155 hole 75 paste-5000 mask+2.5: 1(-155.91,0)
  oval 95x155 / inner round 95 / far side oval 95x155 hole 75 paste-5000 mask+2.5: 2(0,0) 3(155.91,0)
  silkscreen extent -243,-217 243,197, body extent -243,-217 243,197, height 492
P2500-8T [mil]
  rect 60x60 / inner round 60 / far side rect 60x60 hole 40 paste-5000 mask+2.5: 1(344.49,0)
  round 60 hole 40 paste-5000 mask+2.5: 2(246.06,0) 3(147.64,0) 4(49.21,0) 5(-49.21,0) 6(-147.64,0) 7(-246.06,0) 8(-344.49,0)
  silkscreen extent -449,-102 449,134, body extent -449,-102 449,134, height 276
qfp100-050-1414l [mil]
  rect 10x59 smd paste+0 mask+2.5: 1(-236.22,-305.12) 2(-216.54,-305.12) 3(-196.85,-305.12) 4(-177.17,-305.12) 5(-157.48,-305.12) 6(-137.8,-305.12) 7(-118.11,-305.12) 8(-98.43,-305.12) 9(-78.74,-305.12) 10(-59.06,-305.12) 11(-39.37,-305.12) 12(-19.69,-305.12) 13(0,-305.12) 14(19.69,-305.12) 15(39.37,-305.12) 16(59.06,-305.12) 17(78.74,-305.12) 18(98.43,-305.12) 19(118.11,-305.12) 20(137.8,-305.12) 21(157.48,-305.12) 22(177.17,-305.12) 23(196.85,-305.12) 24(216.54,-305.12) 25(236.22,-305.12) 51(236.22,305.12) 52(216.54,305.12) 53(196.85,305.12) 54(177.17,305.12) 55(157.48,305.12) 56(137.8,305.12) 57(118.11,305.12) 58(98.43,305.12) 59(78.74,305.12) 60(59.06,305.12) 61(39.37,305.12) 62(19.69,305.12) 63(0,305.12) 64(-19.69,305.12) 65(-39.37,305.12) 66(-59.06,305.12) 67(-78.74,305.12) 68(-98.43,305.12) 69(-118.11,305.12) 70(-137.8,305.12) 71(-157.48,305.12) 72(-177.17,305.12) 73(-196.85,305.12) 74(-216.54,305.12) 75(-236.22,305.12)
  rect 59x10 smd paste+0 mask+2.5: 26(305.12,-236.22) 27(305.12,-216.54) 28(305.12,-196.85) 29(305.12,-177.17) 30(305.12,-157.48) 31(305.12,-137.8) 32(305.12,-118.11) 33(305.12,-98.43) 34(305.12,-78.74) 35(305.12,-59.06) 36(305.12,-39.37) 37(305.12,-19.68) 38(305.12,0) 39(305.12,19.68) 40(305.12,39.37) 41(305.12,59.06) 42(305.12,78.74) 43(305.12,98.43) 44(305.12,118.11) 45(305.12,137.8) 46(305.12,157.48) 47(305.12,177.17) 48(305.12,196.85) 49(305.12,216.54) 50(305.12,236.22) 76(-305.12,236.22) 77(-305.12,216.54) 78(-305.12,196.85) 79(-305.12,177.17) 80(-305.12,157.48) 81(-305.12,137.8) 82(-305.12,118.11) 83(-305.12,98.43) 84(-305.12,78.74) 85(-305.12,59.06) 86(-305.12,39.37) 87(-305.12,19.68) 88(-305.12,0) 89(-305.12,-19.68) 90(-305.12,-39.37) 91(-305.12,-59.06) 92(-305.12,-78.74) 93(-305.12,-98.43) 94(-305.12,-118.11) 95(-305.12,-137.8) 96(-305.12,-157.48) 97(-305.12,-177.17) 98(-305.12,-196.85) 99(-305.12,-216.54) 100(-305.12,-236.22)
  silkscreen extent -384,-384 384,384, body extent -345,-345 345,345, height 63
SC2-250-228 [mil]
  rect 63x138 smd paste+0 mask+2.5: 1(0,110.24) 2(0,-110.24)
  silkscreen extent -136,-232 136,193, body extent -134,-193 134,193, height 228
SC2-250-303 [mil]
  rect 63x138 smd paste+0 mask+2.5: 1(0,110.24) 2(0,-110.24)
  silkscreen extent -136,-232 136,193, body extent -134,-193 134,193, height 303
SC2-400-400 [mil]
  rect 100x173 smd paste+0 mask+2.5: 1(0,165.35) 2(0,-165.35)
  silkscreen extent -209,-303 209,266, body extent -207,-266 207,266, height 394
sc0603 [mil]
  rect 35x32 smd paste+0 mask+2.5: 1(-30,0) 2(30,0)
  silkscreen extent -55,-24 55,24, body extent -55,-24 55,24, height 10
SC0805 [mil]
  rect 45x50 smd paste+0 mask+2.5: 1(-35,0) 2(35,0)
  silkscreen extent -65,-33 65,33, body extent -65,-33 65,33, height 10
SC1210 [mil]
  rect 55x100 smd paste+0 mask+2.5: 1(-55,0) 2(55,0)
  silkscreen extent -93,-60 93,60, body extent -87,-55 87,55, height 10
SD0805 [mil]
  rect 40x50 smd paste+0 mask+2.5: 1(-43.5,0) 2(43.5,0)
  silkscreen extent -85,-33 75,33, body extent -85,-33 75,33, height 47
SD1005 [mil]
  rect 28x33 smd paste+0 mask+2.5: 1(-45,0) 2(45,0)
  silkscreen extent -82,-35 72,35, body extent -60,-30 60,30, height 40
SD2216 [mil]
  rect 75x80 smd paste+0 mask+2.5: 1(-97.5,0) 2(97.5,0)
  silkscreen extent -154,-86 144,86, body extent -154,-86 144,86, height 403
SL0805 [mil]
  rect 44x57 smd paste+0 mask+2.5: 1(-34.5,0) 2(34.5,0)
  silkscreen extent -65,-37 65,37, body extent -65,-37 65,37, height 42
sop8-50-150 [mil]
  rect 23x70 smd paste+0 mask+2.5: 1(-75,-100) 2(-25,-100) 3(25,-100) 4(75,-100) 5(75,100) 6(25,100) 7(-25,100) 8(-75,100)
  silkscreen extent -115,-110 98,55, body extent -99,-138 99,138, height 69
SOP8-50-150-SR [mil]
  rect 23x70 smd paste+0 mask+2.5: 1(-75,-100) 2(-25,-100) 3(25,-100) 4(75,-100) 5(75,100) 6(25,100) 7(-25,100) 8(-75,100)
  rect 120x80 smd paste+0 mask+2.5: 9(0,0)
  silkscreen extent -98,-55 98,55, body extent -98,-138 98,138, height 69
sop14-50-150 [mil]
  rect 23x70 smd paste+0 mask+2.5: 1(-150,-100) 2(-100,-100) 3(-50,-100) 4(0,-100) 5(50,-100) 6(100,-100) 7(150,-100) 8(150,100) 9(100,100) 10(50,100) 11(0,100) 12(-50,100) 13(-100,100) 14(-150,100)
  silkscreen extent -172,-55 172,55, body extent -172,-138 172,138, height 69
sop16-50-150 [mil]
  rect 23x70 smd paste+0 mask+2.5: 1(-175,-100) 2(-125,-100) 3(-75,-100) 4(-25,-100) 5(25,-100) 6(75,-100) 7(125,-100) 8(175,-100) 9(175,100) 10(125,100) 11(75,100) 12(25,100) 13(-25,100) 14(-75,100) 15(-125,100) 16(-175,100)
  silkscreen extent -197,-55 197,55, body extent -197,-138 197,138, height 69
sop20-26-173 [mil]
  rect 12x72 smd paste+0 mask+2.5: 1(-115.16,-111.61) 2(-89.57,-111.61) 3(-63.98,-111.61) 4(-38.39,-111.61) 5(-12.8,-111.61) 6(12.8,-111.61) 7(38.39,-111.61) 8(63.98,-111.61) 9(89.57,-111.61) 10(115.16,-111.61) 11(115.16,111.61) 12(89.57,111.61) 13(63.98,111.61) 14(38.39,111.61) 15(12.8,111.61) 16(-12.8,111.61) 17(-38.39,111.61) 18(-63.98,111.61) 19(-89.57,111.61) 20(-115.16,111.61)
  silkscreen extent -132,-69 132,69, body extent -132,-157 132,157, height 59
sop20-26-208 [mil]
  rect 16x90 smd paste+0 mask+2.5: 1(-115.16,-131.3) 2(-89.57,-131.3) 3(-63.98,-131.3) 4(-38.39,-131.3) 5(-12.8,-131.3) 6(12.8,-131.3) 7(38.39,-131.3) 8(63.98,-131.3) 9(89.57,-131.3) 10(115.16,-131.3) 11(115.16,131.3) 12(89.57,131.3) 13(63.98,131.3) 14(38.39,131.3) 15(12.8,131.3) 16(-12.8,131.3) 17(-38.39,131.3) 18(-63.98,131.3) 19(-89.57,131.3) 20(-115.16,131.3)
  silkscreen extent -144,-79 144,79, body extent -144,-183 144,183, height 79
sot23-1 [mil]
  rect 40x47 smd paste+0 mask+2.5: 1(-37.5,-41.5) 2(37.5,-41.5) 3(0,41.5)
  silkscreen extent -65,-73 65,72, body extent -65,-73 65,72, height 41
SOT23-3 [mm]
  rect 0.635x1.143 smd paste+0 mask+0.064: 1(-0.95,-1) 2(0.95,-1) 3(0,1)
  silkscreen extent -1.52,-0.7 1.52,0.7, body extent -1.52,-0.7 1.52,0.7, height 1.11
SOT-DPAK [mil]
  rect 60x80 smd paste+0 mask+2.5: 1(-90,-0.1) 3(90,-0.1)
  rect 240x258 smd paste+0 mask+2.5: 4(0,258.66)
  silkscreen extent -139,-52 141,394, body extent -139,-52 141,394, height 94
SPL-6P1-5P5 [mil]
  rect 217x114 smd paste+0 mask+2.5: 1(0,-82.68) 2(0,82.68)
  silkscreen extent -116,-148 116,148, body extent -116,-148 116,148, height 189
SPL-12P8-12P8-A [mil]
  rect 157x276 smd paste+0 mask+2.5: 1(196.85,0) 2(-196.85,0)
  silkscreen extent -252,-252 252,252, body extent -283,-252 283,252, height 1063
SR0603 [mil]
  rect 30x32 smd paste+0 mask+2.5: 1(-30,0) 2(30,0)
  silkscreen extent -55,-25 55,25, body extent -49,-20 49,20, height 22
sr0805 [mil]
  rect 40x45 smd paste+0 mask+2.5: 1(-40,0) 2(40,0)
  silkscreen extent -70,-30 70,30, body extent -64,-27 64,27, height 24
sr1206 [mil]
  rect 55x63 smd paste+0 mask+2.5: 1(-55,0) 2(55,0)
  silkscreen extent -95,-45 95,45, body extent -86,-36 86,36, height 28
STC3528 [mil]
  rect 90x80 smd paste+0 mask+2.5: 1(-65,0) 2(65,0)
  silkscreen extent -145,-65 125,65, body extent -145,-65 125,65, height 83
STFM4-100-275 [mil]
  rect 60x64 smd paste+0 mask+2.5: 1(-100,-130.71) 3(100,-130.71) 4(100,130.71) 6(-100,130.71)
  silkscreen extent -169,-177 140,177, body extent -138,-170 138,170, height 130
SX4-0705 [mil]
  rect 95x65 smd paste+0 mask+2.5: 1(-82.5,100) 2(-82.5,-100) 3(82.5,-100) 4(82.5,100)
  silkscreen extent -140,-143 140,173, body extent -140,-143 140,143, height 59
to220-3ra [mil]
  rect 60x80 / inner round 60 / far side rect 60x80 hole 45 paste-5000 mask+2.5: 1(-100,0)
  oval 60x80 / inner round 60 / far side oval 60x80 hole 45 paste-5000 mask+2.5: 2(0,0) 3(100,0)
  round 100 hole 150 unplated paste-5000 mask+27.5: ""(0,650)
  silkscreen extent -203,70 202,785, body extent -203,-48 202,785, height 190
TP40 [mil]
  round 60 hole 40 paste-5000 mask+2.5: 1(0,0)
  silkscreen extent -69,-69 69,69, body extent -69,-69 69,69, height 202